# EAGLE board 24V AC SSR Board_old_nofeedback (EAGLE 7.3.0)
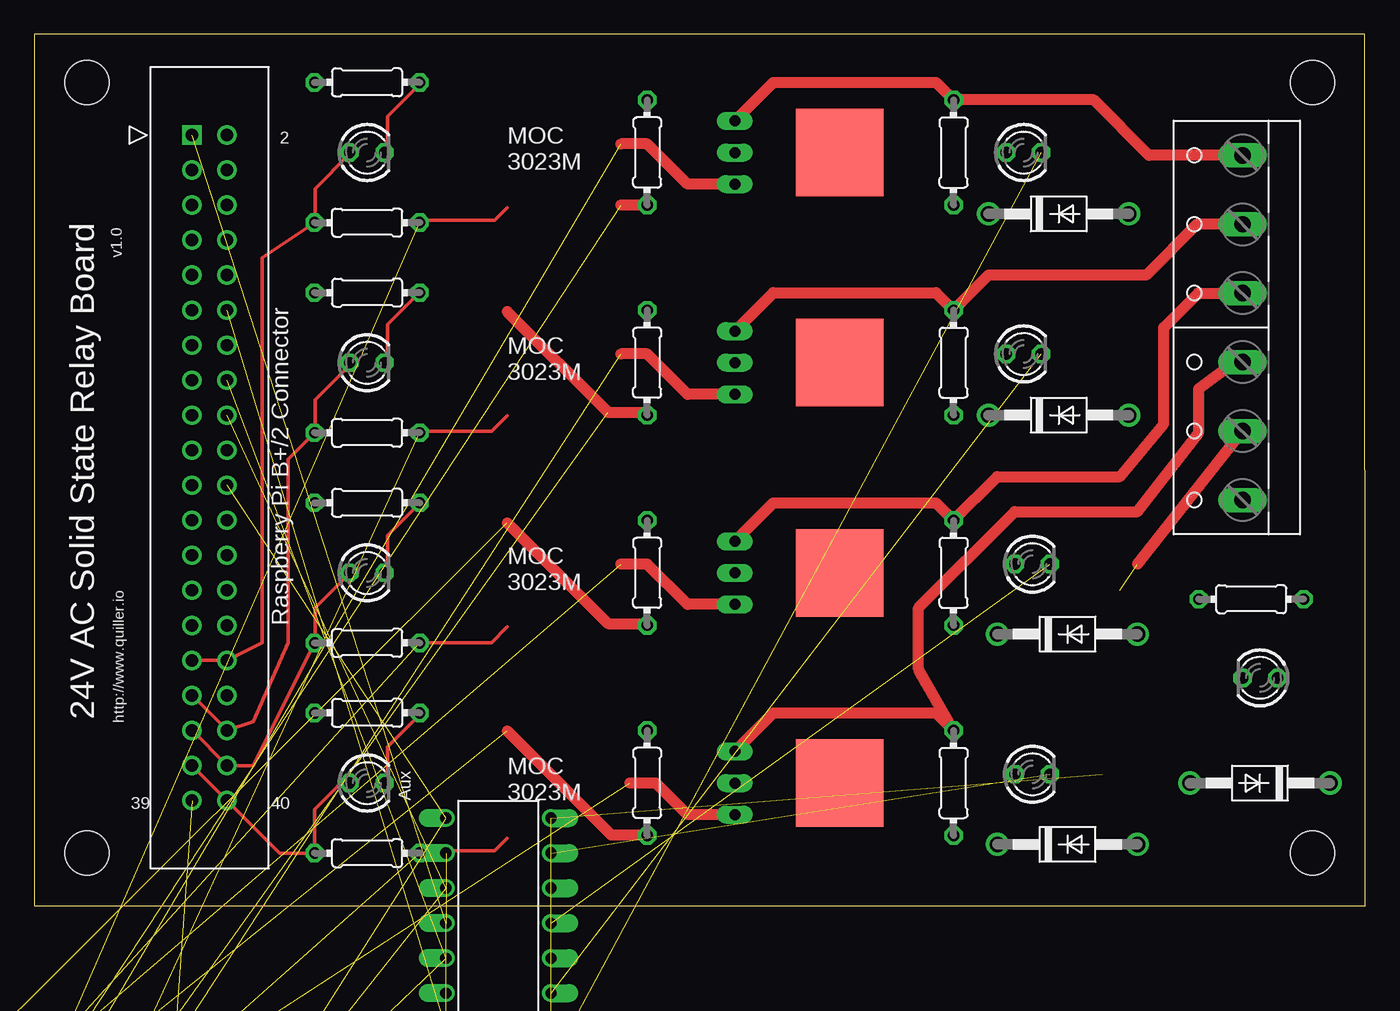
[diagram p0: board, top side]
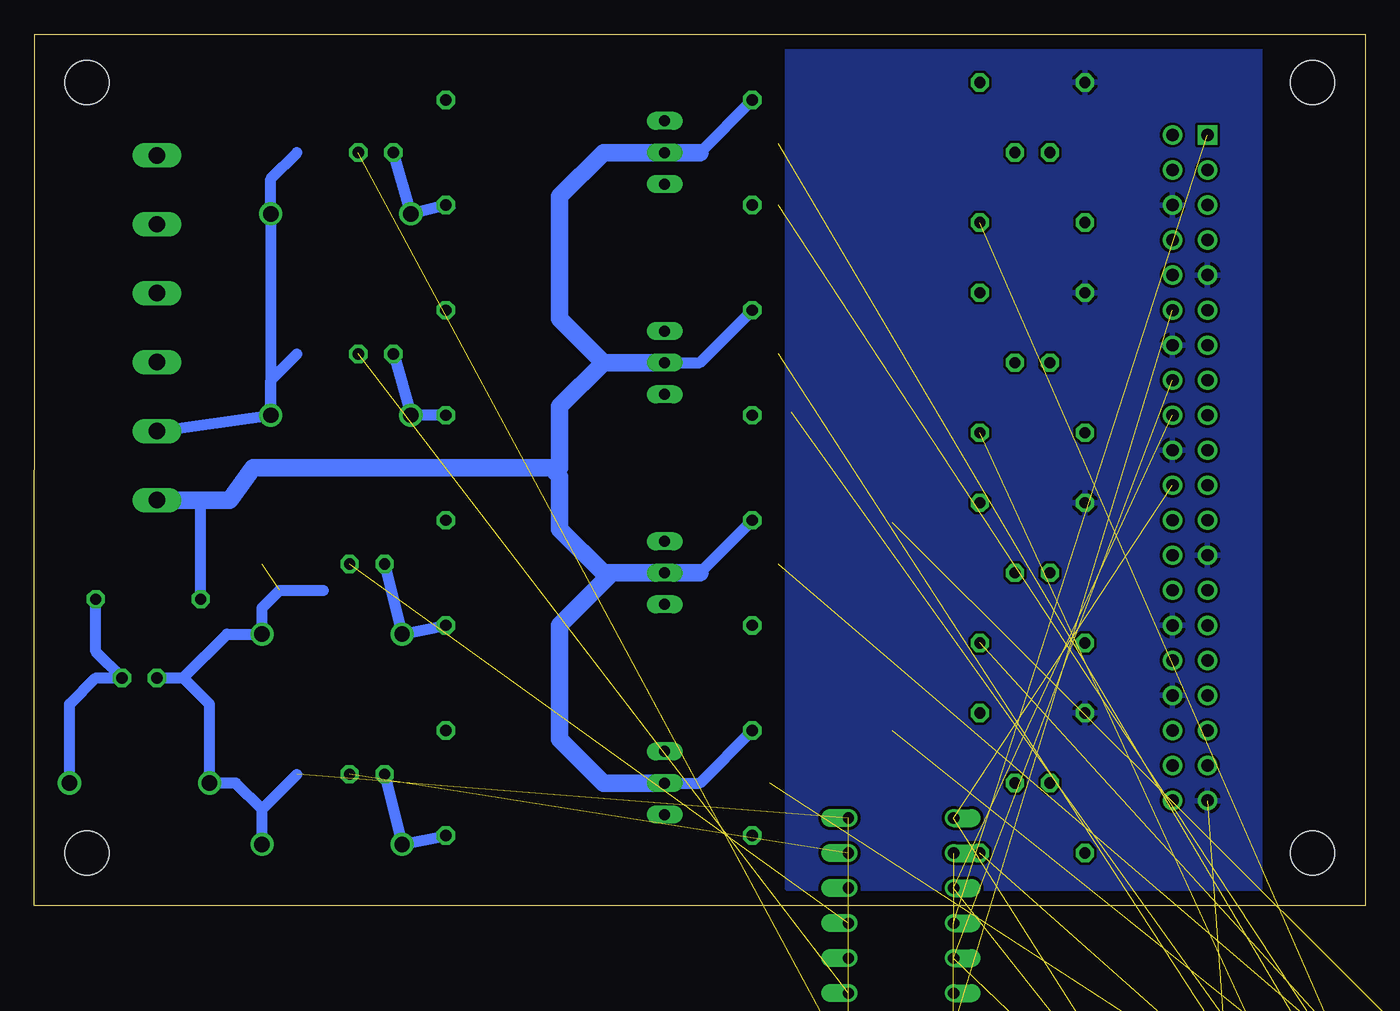
[diagram p1: board, bottom side, seen from below]

Size 96.52 x 63.17 mm. Coordinates in mm from the lower left corner, seen from the top.
Outline: 0,0 96.52,0 96.5,63.17 0,63.17 0,0
Copper layers (1*16): Top 0.035mm / dielectric 1.5mm / Bottom 0.035mm
Design rules "default": minimum track width 10mil, minimum drill 24mil, track to track 8mil, track to pad 8mil, pad to pad 8mil, via to via 8mil, smd to smd 8mil, copper to edge 40mil, drill to drill 8mil, minimum pad ring 10mil, minimum via ring 8mil, stop-mask expansion 4mil, vias tented up to drill 0mil, thermal gap 10mil
Holes 3.2 mm at 3.81,3.81 92.71,3.81 92.71,59.69 3.81,59.69

## Footprints (pad centres in the part's own frame; a part is rotated, then mirrored left to right if it is on the bottom)
DO41-10 = drill 1.118: A 5.08,0; C -5.08,0
3M_2540-6002UB = drill 0.889 square: 1 0,2.54 | drill 0.889: 2 0,0; 3 -2.54,2.54; 4 -2.54,0; 5 -5.08,2.54; 6 -5.08,0; 7 -7.62,2.54; 8 -7.62,0; 9 -10.16,2.54; 10 -10.16,0; 11 -12.7,2.54; 12 -12.7,0; 13 -15.24,2.54; 14 -15.24,0; 15 -17.78,2.54; 16 -17.78,0; 17 -20.32,2.54; 18 -20.32,0; 19 -22.86,2.54; 20 -22.86,0; 21 -25.4,2.54; 22 -25.4,0; 23 -27.94,2.54; 24 -27.94,0; 25 -30.48,2.54; 26 -30.48,0; 27 -33.02,2.54; 28 -33.02,0; 29 -35.56,2.54; 30 -35.56,0; 31 -38.1,2.54; 32 -38.1,0; 33 -40.64,2.54; 34 -40.64,0; 35 -43.18,2.54; 36 -43.18,0; 37 -45.72,2.54; 38 -45.72,0; 39 -48.26,2.54; 40 -48.26,0
LED3MM = drill 0.813 octagon: A -1.27,0; K 1.27,0
DIL16 = drill 0.813 offset: 1 -8.89,-3.81; 2 -6.35,-3.81; 3 -3.81,-3.81; 4 -1.27,-3.81; 5 1.27,-3.81; 6 3.81,-3.81; 7 6.35,-3.81; 8 8.89,-3.81; 9 8.89,3.81; 10 6.35,3.81; 11 3.81,3.81; 12 1.27,3.81; 13 -1.27,3.81; 14 -3.81,3.81; 15 -6.35,3.81; 16 -8.89,3.81
0204/7 = drill 0.813 octagon: 1 -3.81,0; 2 3.81,0
W237-6 = drill 1.194 long: 1 -12.5,-1.27; 2 -7.5,-1.27; 3 -2.5,-1.27; 4 2.5,-1.27; 5 7.5,-1.27; 6 12.5,-1.27
SOT-82 = drill 0.8 long: P$1 -2.29,0; P$2 0,0; P$3 2.29,0 | smd 6.35 x 6.35: P$4 0,7.62
DIL08 = drill 0.813 offset: 1 -3.81,-3.81; 2 -1.27,-3.81; 3 1.27,-3.81; 4 3.81,-3.81; 5 3.81,3.81; 6 1.27,3.81; 7 -1.27,3.81; 8 -3.81,3.81

## Placement (x,y rotation side)
D1  1N4004  [DO41-10]  88.9,8.89 180 top
D2  1N4001  [DO41-10]  74.3,50.16 0 top
D3  1N4001  [DO41-10]  74.3,35.56 0 top
D4  1N4001  [DO41-10]  74.93,19.68 0 top
D5  1N4001  [DO41-10]  74.93,4.45 0 top
IN  30340-6002HB  [3M_2540-6002UB]  13.97,55.88 90 top
LED1  White  [LED3MM]  24.13,54.61 0 top
LED2  Green  [LED3MM]  24.13,39.37 0 top
LED3  Yellow  [LED3MM]  24.13,24.13 0 top
LED4  red  [LED3MM]  88.9,16.51 180 top
LED5  White  [LED3MM]  71.75,54.61 0 top
LED6  Green  [LED3MM]  71.75,40 0 top
LED7  Yellow  [LED3MM]  72.39,24.77 0 top
LED8  Blue  [LED3MM]  24.13,8.89 0 top
LED9  Blue  [LED3MM]  72.39,9.52 0 top
OPTO-ISO  LTV-845  [DIL16]  33.66,-2.54 90 top
R1  100  [0204/7]  44.45,54.61 90 top
R2  330  [0204/7]  24.13,49.53 0 top
R3  100  [0204/7]  44.45,39.37 90 top
R4  330  [0204/7]  24.13,34.29 0 top
R5  100  [0204/7]  44.45,24.13 90 top
R6  330  [0204/7]  24.13,19.05 0 top
R7  56  [0204/7]  24.13,59.69 180 top
R8  56  [0204/7]  24.13,44.45 180 top
R9  56  [0204/7]  24.13,29.21 180 top
R10  2.2K  [0204/7]  88.27,22.22 0 top
R11  2.2K  [0204/7]  66.67,54.61 270 top
R12  2.2K  [0204/7]  66.67,39.37 270 top
R13  2.2K  [0204/7]  66.67,24.13 270 top
R14  330  [0204/7]  24.13,3.81 0 top
R15  56  [0204/7]  24.13,13.97 180 top
R16  100  [0204/7]  44.45,8.89 90 top
R17  2.2K  [0204/7]  66.67,8.89 270 top
R18  4.7K  [0204/7]  5.08,-27.3 0 top  (outside the outline)
R19  4.7K  [0204/7]  5.08,-31.12 0 top  (outside the outline)
R20  4.7K  [0204/7]  5.08,-34.93 0 top  (outside the outline)
R21  4.7K  [0204/7]  5.08,-38.73 0 top  (outside the outline)
TERM  [W237-6]  86.36,41.91 90 top
U$1  BT134  [SOT-82]  50.8,54.61 270 top
U$2  BT134  [SOT-82]  50.8,39.37 270 top
U$3  BT134  [SOT-82]  50.8,24.13 270 top
U$4  BT134  [SOT-82]  50.8,8.89 270 top
U$5  TLP525G−4  [DIL08]  -5.71,-32.39 0 top  (outside the outline)
U$6  TLP525G−4  [DIL08]  -18.41,-32.39 0 top  (outside the outline)

## Library data of the parts
D1-D5 = diode
IN = 3M_By_element14_Batch_1; MPN: 2540-6002UB; OC_FARNELL: 1368965; OC_NEWARK: 46F4732; PACKAGE: Four-Wall Header, 40way; SUPPLIER: 3M
LED1-LED9 = led
OPTO-ISO U$5 U$6 = myhvac
R1-R21 = rcl
TERM = con-wago-500; OC_FARNELL: unknown; OC_NEWARK: unknown
U$1-U$4 = nich

## Nets
3.3V_SOURCE: IN.1 OPTO-ISO.10 OPTO-ISO.12 OPTO-ISO.14 OPTO-ISO.16
+24V: R1.2 R3.2 R5.2 R10.1 R16.2 TERM.1 U$1.P$2 U$2.P$2 U$3.P$2 U$4.P$2
AUX_IN: IN.37 IN.40 LED8.A R14.1
AUX_LOOPBACK: IN.22 OPTO-ISO.9 R21.1
AUX_OUT: R17.1 TERM.3 U$4.P$1
GND: IN.6 IN.9 IN.14 IN.20 IN.25 IN.30 IN.34 IN.39 R7.2 R8.2 R9.2 R15.2 R18.2 R19.2 R20.2 R21.2 U$5.2 U$5.4 U$6.2 U$6.4
GREEN_IN: IN.33 IN.36 LED2.A R4.1
GREEN_LOOPBACK: IN.16 OPTO-ISO.13 R19.1
GREEN_OUT: R12.1 TERM.5 U$2.P$1
N$1: U$1.P$3 U$5.7
N$2: R2.2 U$5.1
N$3: U$4.P$3 U$6.5
N$4: R1.1 U$5.8
N$5: U$3.P$3 U$6.7
N$6: R4.2 U$5.3
N$7: U$2.P$3 U$5.5
N$8: R3.1 U$5.6
N$9: LED5.K OPTO-ISO.1
N$10: R6.2 U$6.1
N$11: LED6.K OPTO-ISO.3
N$12: R5.1 U$6.8
N$13: LED7.K OPTO-ISO.5
N$14: LED9.K OPTO-ISO.7
N$17: LED1.K R7.1
N$18: LED2.K R8.1
N$20: LED3.K R9.1
N$21: D2.C LED5.A R11.2
N$22: D3.C LED6.A R12.2
N$23: D4.C LED7.A R13.2
N$24: D1.C LED4.A R10.2
N$27: R14.2 U$6.3
N$28: LED8.K R15.1
N$29: R16.1 U$6.6
N$30: D5.C LED9.A R17.2
V-: D1.A D2.A D3.A D4.A D5.A LED4.K OPTO-ISO.2 OPTO-ISO.4 OPTO-ISO.6 OPTO-ISO.8 TERM.2
WHITE_IN: IN.31 IN.32 LED1.A R2.1
WHITE_LOOPBACK: IN.12 OPTO-ISO.15 R18.1
WHITE_OUT: R11.1 TERM.6 U$1.P$1
YELLOW_IN: IN.35 IN.38 LED3.A R6.1
YELLOW_LOOPBACK: IN.18 OPTO-ISO.11 R20.1
YELLOW_OUT: R13.1 TERM.4 U$3.P$1

## Tracks (layer width: path | path; a pad name or v marks a point on that pad's centre or on a via)
3.3V_SOURCE  (4 unrouted)
+24V
  Bottom 0.406: 58.74,31.43 59.05,31.75
  Bottom 0.813: R10.1 84.45,29.41 | U$2.P$2 48.26,39.37 R3.2 | U$1.P$2 48.26,54.61 R1.2 | U$3.P$2 48.26,24.13 R5.2 | U$4.P$2 48.26,8.89 R16.2
  Bottom 1.27: TERM.1 84.45,29.41 82.35,29.41 80.64,31.75 59.05,31.75 | U$3.P$2 55.24,24.13 58.42,27.3 58.42,31.11 58.74,31.43 58.42,31.75 58.42,36.19 55.24,39.37 | U$2.P$2 55.24,39.37 | 48.26,54.61 55.24,54.61 58.42,51.44 58.42,42.55 55.24,39.37 | 48.26,24.13 54.61,24.13 58.42,20.32 58.42,12.06 55.24,8.89 U$4.P$2
AUX_IN
  Top 0.254: 20.34,3.99 R14.1 17.78,3.81 IN.40 IN.37 | 22.86,8.79 LED8.A | 20.32,4.01 20.32,6.98 22.23,8.89
  Top 0.406: 20.34,3.99 20.32,4.01 | 22.23,8.89 LED8.A
AUX_LOOPBACK  (2 unrouted)
AUX_OUT
  Top 0.406: 87.03,39.41 TERM.3
  Top 0.813: 87.03,39.41 84.45,37.47 84.45,34.29 80.01,28.58 71.12,28.58 64.14,21.59 64.14,17.14 R17.1 65.41,13.97 53.59,13.97 U$4.P$1
GND  (8 unrouted)
  pour Bottom: 7.62,62.23 7.62,1.27 41.91,1.27 41.91,62.23
GREEN_IN
  Top 0.254: LED2.A 22.86,39.19 20.34,36.68 20.34,34.39 R4.1 18.41,32.38 18.41,19.05 15.88,13.34 IN.36 IN.33
GREEN_LOOPBACK  (2 unrouted)
GREEN_OUT
  Top 0.813: U$2.P$1 53.59,44.45 65.41,44.45 R12.1 69.22,45.72 80.64,45.72 84.33,49.41 TERM.5
N$1  (1 unrouted)
  Top 0.813: U$1.P$3 47.38,52.32 44.45,55.25 42.55,55.25
N$2  (1 unrouted)
  Top 0.254: 34.29,50.62 33.38,49.71 28.12,49.71 R2.2
N$3  (1 unrouted)
  Top 0.813: U$4.P$3 47.38,6.6 45.09,8.89 43.18,8.89
N$4  (1 unrouted)
  Top 0.813: R1.1 42.55,50.8
N$5  (1 unrouted)
  Top 0.813: U$3.P$3 47.38,21.84 44.45,24.77 42.55,24.77
N$6  (1 unrouted)
  Top 0.254: 34.29,35.53 33.15,34.39 28.12,34.39 R4.2
N$7  (1 unrouted)
  Top 0.813: U$2.P$3 47.38,37.08 44.45,40 42.55,40
N$8  (1 unrouted)
  Top 0.254: 44.35,35.76 R3.1
  Top 0.813: 44.35,35.76 41.6,35.76 34.29,43.08
N$9  (1 unrouted)
N$10  (1 unrouted)
  Top 0.254: 34.29,20.22 33.15,19.07 28.12,19.07 R6.2
N$11  (1 unrouted)
N$12  (1 unrouted)
  Top 0.254: 44.35,20.45 R5.1
  Top 0.813: 44.35,20.45 41.6,20.45 34.29,27.76
N$13  (1 unrouted)
N$14  (1 unrouted)
N$17
  Top 0.254: LED1.K 25.6,54.74 25.6,57.25 27.89,59.54 R7.1
N$18
  Top 0.254: LED2.K 25.6,39.42 25.6,42.16 27.89,44.45 R8.1
N$20
  Top 0.254: LED3.K 25.6,24.33 25.6,26.85 27.89,29.13 R9.1
N$21
  Bottom 0.254: 66.06,50.62 R11.2
  Bottom 0.813: LED5.A D2.C R11.2
N$22
  Bottom 0.813: LED6.A D3.C R12.2
N$23
  Bottom 0.813: R13.2 D4.C LED7.A
N$24
  Bottom 0.813: R10.2 92.08,18.41 LED4.A 92.08,16.51 93.98,14.6 D1.C
N$27  (1 unrouted)
  Top 0.254: 34.29,4.9 33.38,3.99 28.12,3.99 R14.2
N$28
  Top 0.254: LED8.K 25.6,9.02 25.6,11.53 27.89,13.82 R15.1
N$29  (1 unrouted)
  Top 0.254: 44.35,5.13 R16.1
  Top 0.813: 44.35,5.13 41.83,5.13 34.29,12.67
N$30
  Bottom 0.813: R17.2 D5.C LED9.A
V-  (5 unrouted)
  Top 0.813: 80.01,24.77 TERM.2
  Bottom 0.813: TERM.2 D3.A | D3.A D2.A 79.38,52.7 77.47,54.61 | D3.A 79.38,38.1 77.47,40 | 75.56,22.86 78.74,22.86 80.01,21.59 D4.A 82.55,19.68 85.72,16.51 | 80.01,6.98 77.47,9.52 | D5.A 80.01,6.98 | 80.01,6.98 81.92,8.89 D1.A 83.82,14.6 85.72,16.51 | LED4.K 85.72,16.51
WHITE_IN
  Top 0.254: R2.1 20.34,49.71 20.34,51.99 22.86,54.51 LED1.A | 20.12,49.48 R2.1 | IN.31 IN.32 16.51,19.05 16.51,46.99 R2.1
WHITE_LOOPBACK  (2 unrouted)
WHITE_OUT
  Top 0.813: U$1.P$1 53.59,59.69 65.41,59.69 R11.1 76.83,58.42 80.84,54.41 TERM.6
YELLOW_IN
  Top 0.254: LED3.A 22.86,24.1 20.34,21.59 20.34,19.07 R6.1 15.88,10.16 IN.38 IN.35
YELLOW_LOOPBACK  (2 unrouted)
YELLOW_OUT
  Top 0.813: TERM.4 84.42,44.41 81.92,41.91 81.92,34.92 78.74,31.11 69.85,31.11 R13.1 65.41,29.21 53.59,29.21 U$3.P$1

## Text on the board
tNames: 2 | MOC / 3023M | MOC / 3023M | http://www.quiller.io | MOC / 3023M | Raspberry Pi B+/2 Connector | 39 | 40 | Aux | MOC / 3023M
tValues: White | Green | Yellow | Green | Aux | Green | Com | 24V | Yellow | Yellow | Aux
bValues: White | White
_tsilk: 24V AC Solid State Relay Board | v1.0